# Allegro board test.brd
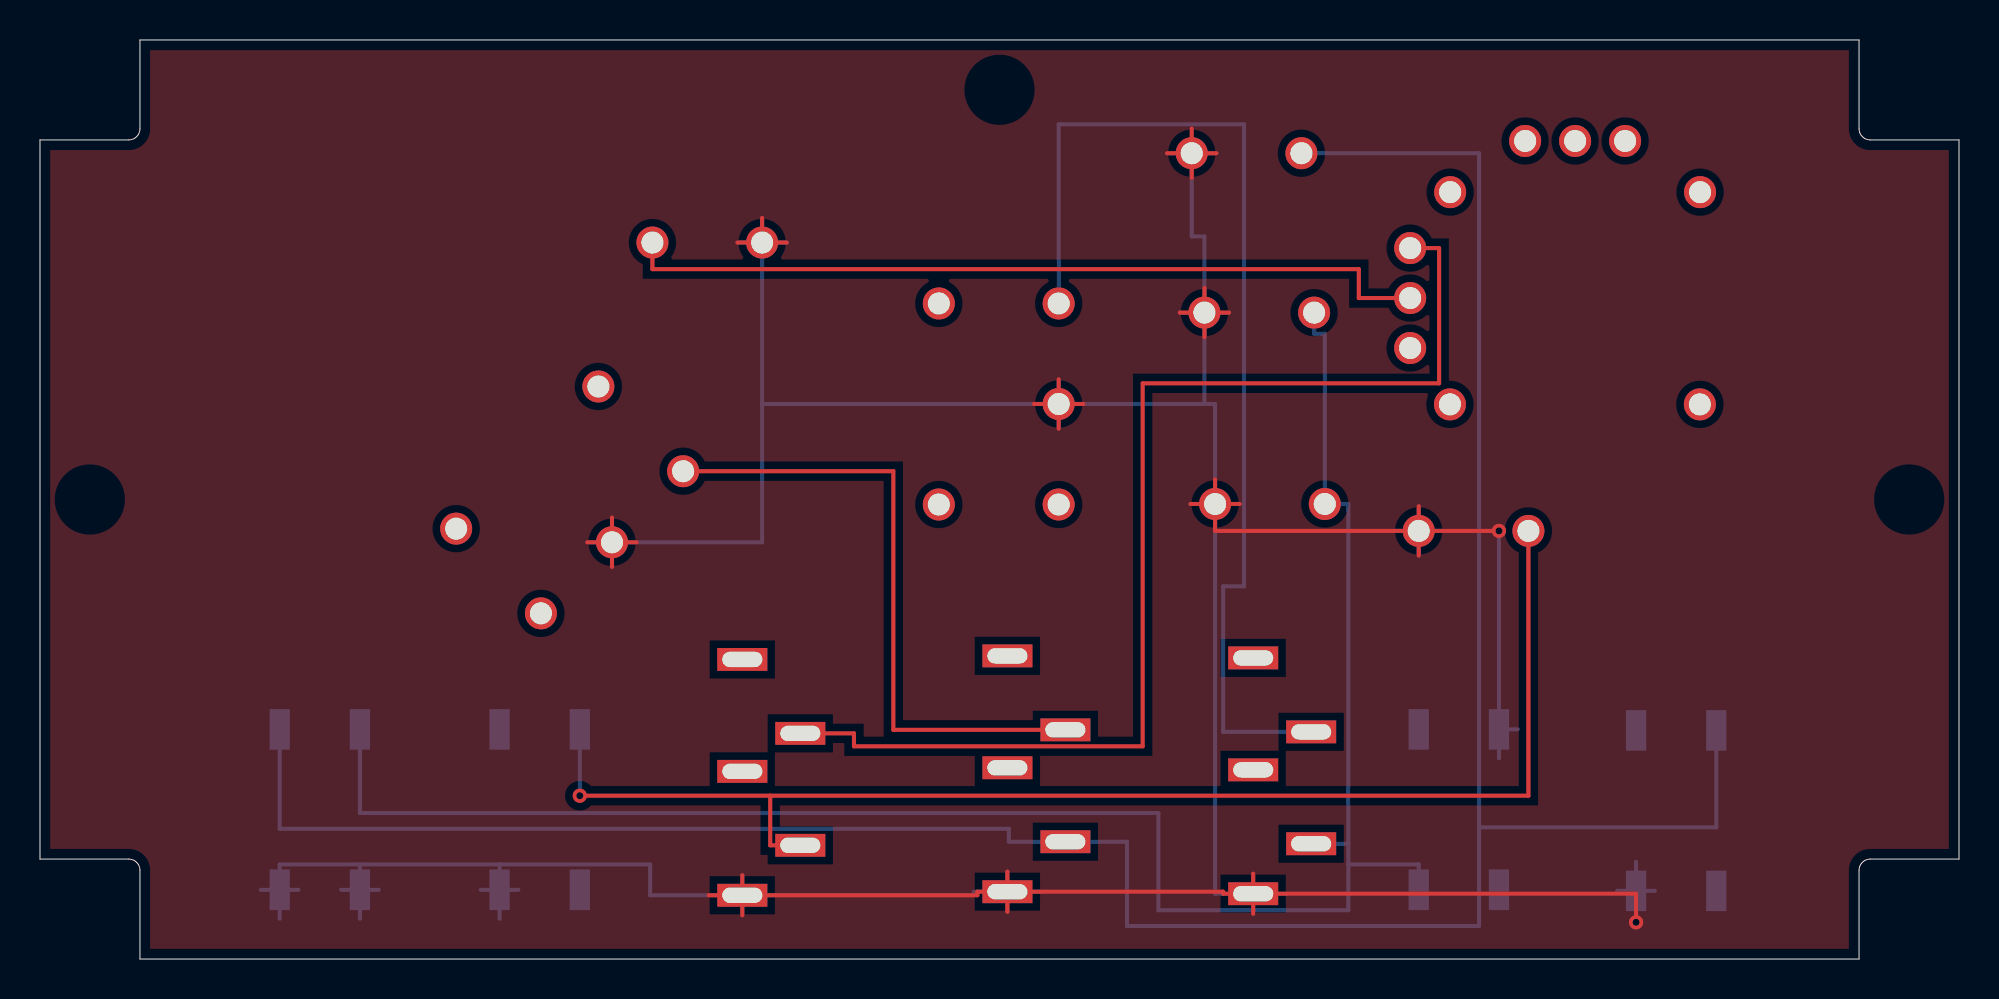
[diagram p0: board, top side]
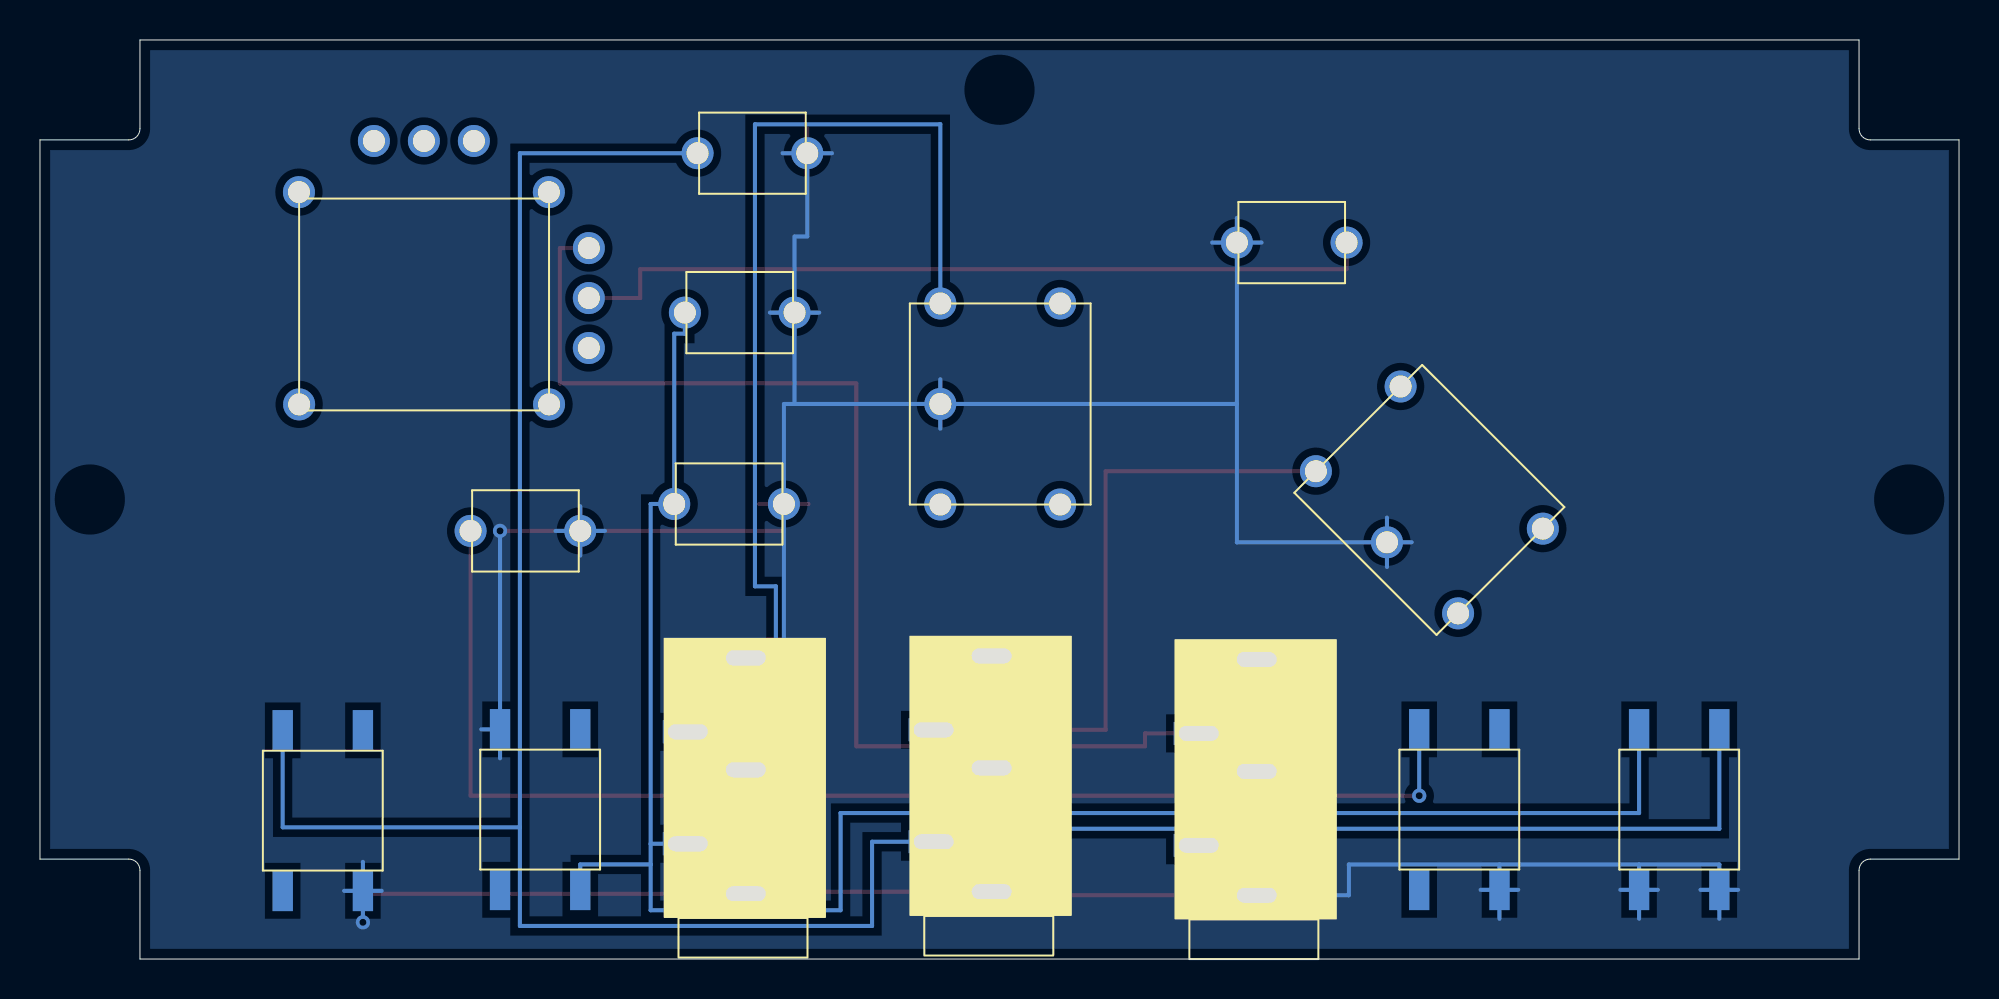
[diagram p1: board, bottom side, seen from below]

Outline 95.98 x 45.98 mm; copper layers: TOP, BOTTOM. Coordinates in mm from the lower left corner of the outline.
Outline path: 0,40.98 4.44,40.98 arc(4.84,41.15) 5,41.54 5,45.98 90.98,45.98 90.98,41.54 arc(91.15,41.15) 91.54,40.98 95.98,40.98 95.98,5 91.54,5 arc(91.15,4.84) 90.98,4.44 90.98,0 5,0 5,4.44 arc(4.84,4.84) 4.44,5 0,5 0,40.98

## Placement (name value [footprint] x y rotation side)
C52  104  [CAPCITA2P]  61.52 22.77 180 bottom
C53  104  [CAPCITA2P]  71.7 21.42 180 bottom
C54  104  [CAPCITA2P]  60.99 32.34 180 bottom
C55  104  [CAPCITA2P]  60.35 40.32 180 bottom
R4  5k  [CAPCITA2P]  33.38 35.85 180 bottom
U2  pot_3pin  [PET_3P]  47.95 27.77 180 bottom
U4  aduio_3.5  [AUDIO_3]  60.73 11.95 0 bottom
U5  aduio_3.5  [AUDIO_3]  48.44 12.05 0 bottom
U6  switch4p  [BUTOM4P]  24.99 7.48 270 bottom
U7  pot_3pin  [PET_3P]  26.49 22.97 135 bottom
U9  switch4p  [BUTOM4P]  14 7.48 270 bottom
U10  switch4p  [BUTOM4P]  81.84 7.43 270 bottom
U11  switch4p  [BUTOM4P]  70.97 7.48 90 bottom
U12  -  [FJM10K]  83.03 27.77 180 bottom
U13  aduio_3.5  [AUDIO_3]  35.18 11.87 0 bottom

## Library data of the parts
C52-C55 = CAP NP
R4 = R
U2 U7 = pot_3pin
U4 U5 U13 = aduio_3.5
U6 U9-U11 = switch4p
U12 = FJM10K

## Footprints (pads in the part's own frame, mm; a bottom-side part is the same pattern mirrored in y, then rotated)
AUDIO_3
  rect 2.5x1.143 hole 2x0.762: 1(-0.05,8.68) 2(-0.05,2.48) 3(-0.05,-3.12) 4(2.85,6.18) 5(2.85,0.58)
BUTOM4P
  rect 2.032x1.016 smd: 1(-4.013,2.007) 2(-4.013,-2.007) 3(4.013,-2.007) 4(4.013,2.007)
CAPCITA2P
  round 1.6 hole 1.1: 1(-2.743,0) 2(2.743,0)
FJM10K
  round 1.6 hole 1.1: 1(3.75,13.16) 2(6.25,13.16) 3(8.75,13.16) 4(14.5,7.8) 5(14.5,5.3) 6(14.5,2.8) 7(0,10.6) 8(0.01,-0.02) 9(12.51,-0.02) 10(12.5,10.6)
PET_3P
  round 1.6 hole 1.1: 1(-2.997,5.029) 2(-2.997,0) 3(-2.997,-5.029) 4(2.997,-5.029) 5(2.997,5.029)

## Nets
GND: C52.2 C53.2 C54.2 C55.2 R4.1 U2.2 U4.1 U5.1 U6.4 U7.2 U9.3 U9.4 U10.4 U11.4 U13.1
N5179542: U5.5 U7.1
N5179644: C55.1 U5.4 U9.1 U10.2
N5179706: C52.1 C54.1 U4.4 U9.2 U11.2
N5179718: U2.1 U4.5
N5179802: C53.1 U6.2 U13.4
N5179854: U12.4 U13.5
N5179866: R4.2 U12.5

Pads without a net: U2 3 4 5; U4 2 3; U5 2 3; U6 1 3; U7 3 4 5; U10 1 3; U11 1 3; U12 1 2 3 6 7 8 9 10; U13 2 3

## Via types
v1: diameter 0.711, hole 0.356, TOP to BOTTOM, 3 vias

## Routing (per net, layer and track width the routed paths; a pad name or vN(x,y) marks a point on that pad's centre or on a via; arc(x,y) is an arc through that point)
GND: length 271.2
  TOP w0.203: 50.95,26.54 U2.2 ; U2.2 52.18,27.77 ; U2.2 50.95,29 ; U2.2 49.72,27.77 ; C54.2 58.24,33.58 ; C54.2 58.24,31.11 ; C54.2 57.01,32.34 ; C54.2 59.47,32.34 ; 27.38,20.85 U7.2 ; U7.2 28.61,19.62 ; U7.2 28.61,22.08 ; U7.2 29.84,20.85 ; C52.2 60.01,22.77 ; C52.2 58.78,24 ; C52.2 57.54,22.77 ; C52.2 58.78,21.42 C53.2 ; v1(79.83,1.84) 79.83,3.27 U4.1 ; 35.13,2.19 U13.1 ; U13.1 33.45,3.19 ; U13.1 46.88,3.19 46.88,3.37 U5.1 ; U13.1 35.13,4.19 ; 34.89,35.85 R4.1 ; R4.1 37.35,35.85 ; R4.1 36.12,37.08 ; 68.96,20.19 C53.2 ; C53.2 68.96,22.65 ; C53.2 v1(72.97,21.42) ; 57.61,39.09 C55.2 ; C55.2 57.61,41.55 ; C55.2 58.84,40.32 ; C55.2 56.37,40.32 ; U5.1 48.39,4.37 ; U5.1 59.18,3.37 59.18,3.27 U4.1 ; U5.1 48.39,2.36 ; 60.68,2.26 U4.1 ; U4.1 60.68,4.27
  BOTTOM w0.203: C55.2 58.84,40.32 ; C55.2 57.61,36.15 58.24,36.15 C54.2 ; C55.2 56.37,40.32 ; U9.4 12.93,3.46 ; U9.4 11.99,2.01 ; U9.4 11.05,3.46 ; U9.4 11.99,4.73 16,4.73 ; 22.99,4.73 30.52,4.73 30.52,3.19 U13.1 ; 22.99,4.73 16,4.73 ; 22.99,4.73 U6.4 ; 58.24,27.77 58.78,27.77 C52.2 58.78,3.27 U4.1 ; 58.24,27.77 U2.2 ; 58.24,27.77 C54.2 ; U13.1 35.13,4.19 ; U13.1 36.81,3.19 ; U13.1 35.13,2.19 ; 46.71,3.37 U5.1 ; U5.1 48.39,2.36 ; U5.1 50.07,3.37 ; U5.1 48.39,4.37 ; 68.96,20.19 C53.2 ; C53.2 68.96,22.65 ; C53.2 67.73,21.42 ; C53.2 70.19,21.42 ; 57.01,32.34 C54.2 ; C54.2 59.47,32.34 ; U7.2 36.12,20.85 36.12,27.77 ; U7.2 28.61,22.08 ; U7.2 28.61,19.62 ; U7.2 27.38,20.85 ; U2.2 50.95,29 ; U2.2 36.12,27.77 ; U2.2 50.95,26.54 ; 15.06,3.46 U9.3 ; U9.3 16.94,3.46 ; U9.3 16,2.01 ; U9.3 16,4.73 ; U4.1 62.36,3.27 ; U4.1 60.68,4.27 ; 22.99,2.01 U6.4 ; U6.4 22.05,3.46 ; U6.4 23.93,3.46 ; 36.12,27.77 R4.1 ; R4.1 36.12,37.08 ; R4.1 37.35,35.85 ; R4.1 34.89,35.85 ; U10.4 v1(79.83,1.84) ; U10.4 80.77,3.41 ; U10.4 79.83,4.86 ; U10.4 78.89,3.41 ; U11.4 v1(72.97,21.42) ; U11.4 73.91,11.49 ; U11.4 72.97,10.04
N5179542: length 32.1
  TOP w0.203: U5.5 42.68,11.47 42.68,24.41 U7.1
N5179644: length 134.1
  BOTTOM w0.203: U9.1 11.99,6.52 48.46,6.52 48.46,5.87 U5.4 54.37,5.87 54.37,1.65 71.98,1.65 71.98,6.59 ; C55.1 71.98,40.32 71.98,6.59 ; 71.98,6.59 83.85,6.59 U10.2
N5179706: length 96.8
  BOTTOM w0.203: U4.4 65.44,5.77 ; 65.44,5.77 65.44,22.77 C52.1 64.26,31.29 63.73,31.29 C54.1 ; 65.44,5.77 65.44,4.73 ; U9.2 16,7.3 55.94,7.3 55.94,2.44 65.44,2.44 65.44,4.73 ; 65.44,4.73 68.96,4.73 U11.2
N5179718: length 54.1
  BOTTOM w0.203: U4.5 59.18,11.37 59.18,18.65 60.22,18.65 60.22,41.77 50.95,41.77 U2.1
N5179802: length 68
  TOP w0.203: 36.52,8.17 36.52,5.69 U13.4 ; 36.52,8.17 74.45,8.17 C53.1 ; 36.52,8.17 v1(27,8.17)
  BOTTOM w0.203: U6.2 v1(27,8.17)
N5179854: length 59
  TOP w0.203: U12.4 69.98,35.57 69.98,28.8 55.15,28.8 55.15,10.64 40.71,10.64 40.71,11.29 U13.5
N5179866: length 40.7
  TOP w0.203: R4.2 30.63,34.52 65.96,34.52 65.96,33.07 U12.5

## Copper pours and planes (outline as drawn; the poured copper is in the pictures)
GND on TOP, BOTTOM: 5.51,0.51 5.51,4.44 5.2,5.2 4.44,5.51 0.51,5.51 0.51,40.48 4.44,40.48 5.2,40.79 5.51,41.54 5.51,45.48 90.48,45.48 90.48,41.54 90.79,40.79 91.54,40.48 95.48,40.48 95.48,5.51 91.54,5.51 90.79,5.2 90.48,4.44 90.48,0.51

## Text on the board
NCLEGEND-1-2: FIGURE | SIZE | 14.0 | 43.31 | 78.74x30.0 | DRILL CHART: TOP to BOTTOM | ALL UNITS ARE IN MILS | PLATED | QTY | 3 | 30 | 15
